# Altium PCB XOR1.PcbDoc
Units mm, origin at the board's own origin, x right, y up, seen from the top; angles counter-clockwise.
Board outline 27 x 17 mm, 2 copper layers (Top Layer, Bottom Layer); 24 components, 14 nets, 62 pads, 8 vias.
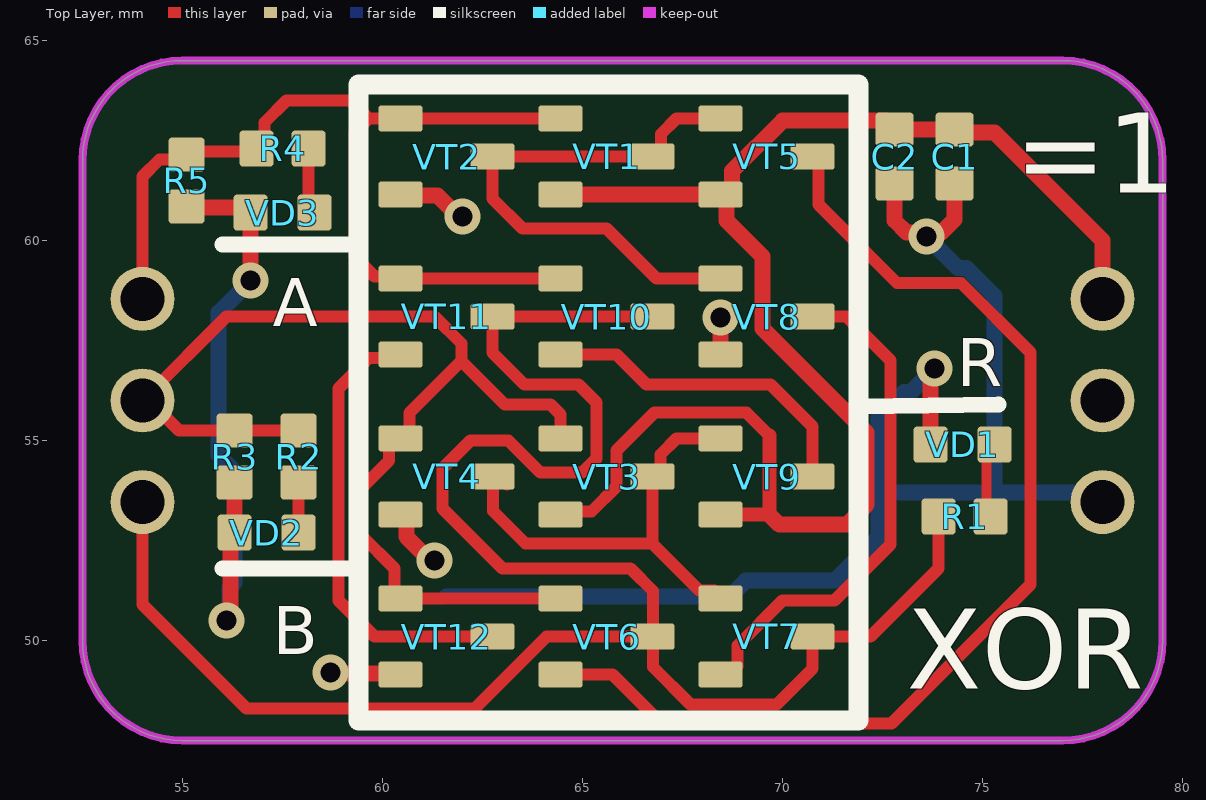
[diagram p0: Top Layer view]
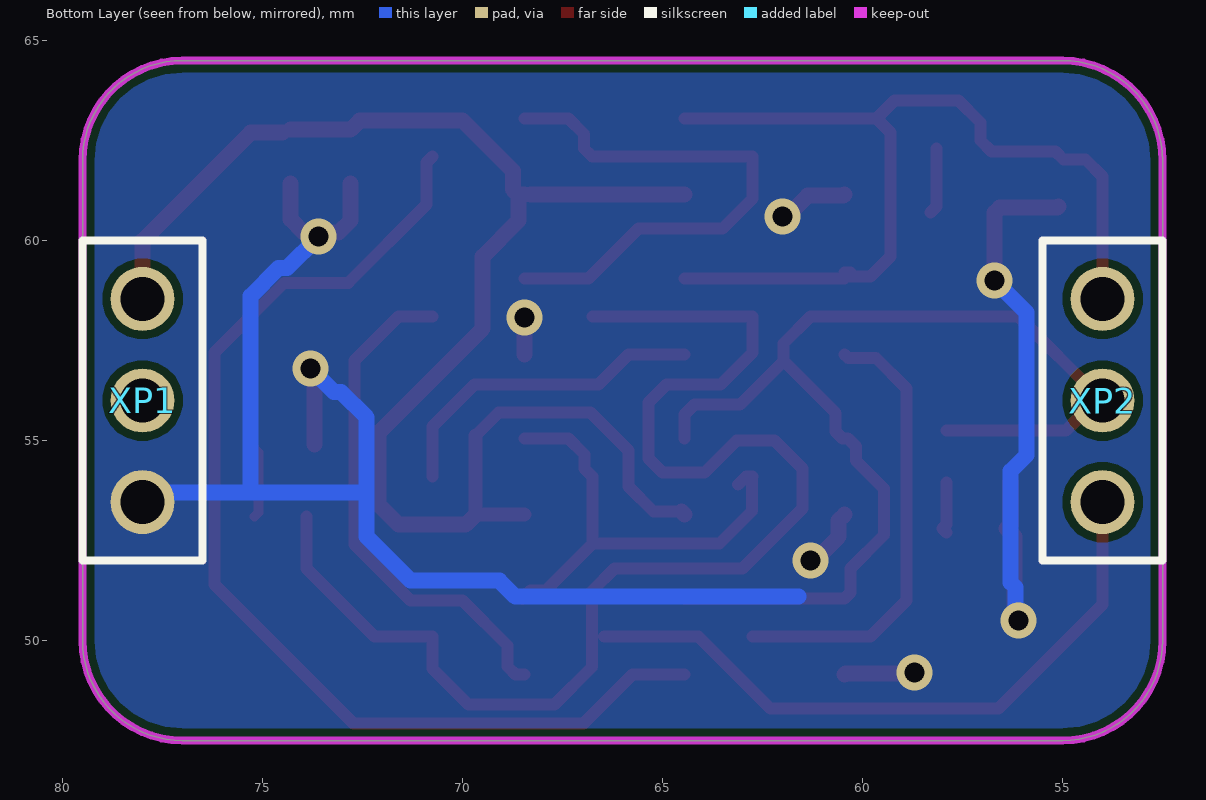
[diagram p1: Bottom Layer view, seen from below]
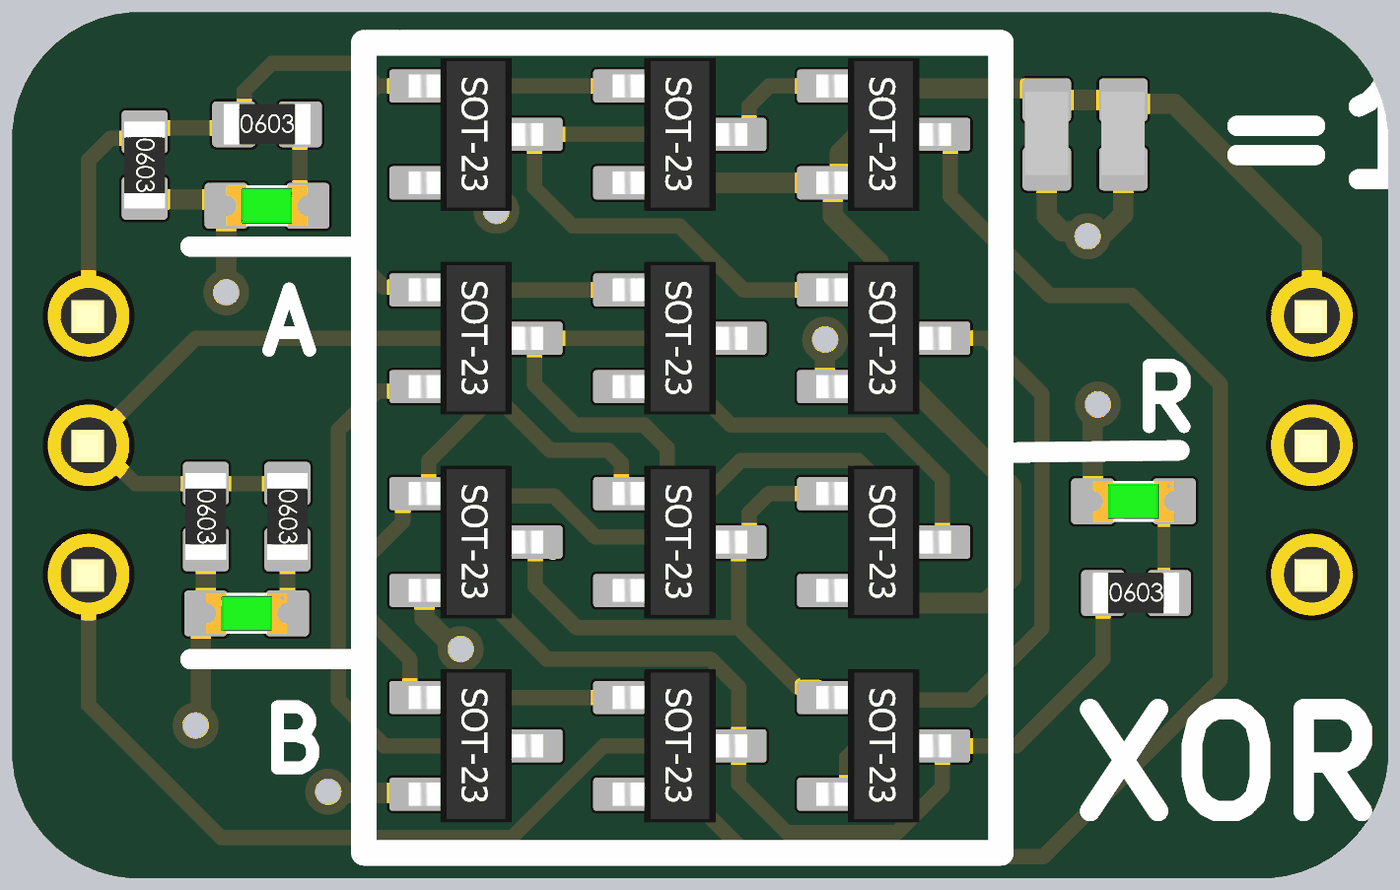
[diagram p2: 3D render of the assembled board from above, using the file's embedded part models]

## Layer stack, top to bottom
Top Solder: solder mask 0.0102, Solder Resist, Dk 3.5
Top Layer: signal copper 0.0356
Dielectric 1: dielectric 0.32, FR-4, Dk 4.8
Bottom Layer: signal copper 0.0356
Bottom Solder: solder mask 0.0102, Solder Resist, Dk 3.5

## Board outline
52.5,50 52.5,62 cw(c55,62) 55,64.5 77,64.5 cw(c77,62) 79.5,62 79.5,50 cw(c77,50) 77,47.5 55,47.5 cw(c55,50)

## Design rules (kind name [scope] priority, off if disabled: settings)
Clearance [All] p1: gap=0.2 ignorepadtopadclearanceinfootprint=FALSE
PolygonConnect [All] p1: connectstyle=Relief reliefconductorwidth=0.254 reliefentries=4 polygonreliefangle="90 Angle" airgapwidth=0.254
RoutingVias [All] p1: holewidth=0.6 width=1.2 viastyle="Through Hole" minholewidth=0.5 minwidth=0.9 maxholewidth=0.711 maxwidth=1.27
SolderMaskExpansion [All] p1: expansion=0.102 istentingtop=FALSE
Width [All] p1: maxlimit=5.254 minlimit=0.2 preferedwidth=0.25
30 further rules are at their usual default settings.

## Components (designator, comment, footprint, x,y, rotation, side; value= is the part's Value field where it differs from the comment)
C1 "0,1 мкФ ±* * * *, *" K10-79_1.6_0.8(0603) 74.3,62.1 r90 top value="0,1 мк"
C2 "0,01 мкФ ±* * * *, *" K10-79_1.6_0.8(0603) 72.8,62.1 r90 top value="0,01 мк"
R1 "1 кОм ±5 % 0603, RC0603JR-071KL" P1-12-0.1(0603) 74.55,53.1 r0 top value="1 к"
R2 "1 кОм ±5 % 0603, RC0603JR-071KL" P1-12-0.1(0603) 57.9,54.6 r270 top value="1 к"
R3 "1 МОм ±5 % 0603, RC0603JR-071KL" P1-12-0.1(0603) 56.3,54.6 r270 top value="1 М"
R4 "1 кОм ±5 % 0603, RC0603JR-071KL" P1-12-0.1(0603) 57.5,62.3 r0 top value="1 к"
R5 "1 МОм ±5 % 0603, RC0603JR-071KL" P1-12-0.1(0603) 55.1,61.5 r270 top value="1 М"
VD1 "VD - Светодиод" "LED 0603" 74.5,54.9 r180 top value=GNL-0805UBC-TL
VD2 "VD - Светодиод" "LED 0603" 57.1,52.7 r180 top value=GNL-0805UBC-TL
VD3 "VD - Светодиод" "LED 0603" 57.5,60.7 r180 top value=GNL-0805UBC-TL
VT1 "VT - Полевой транзистор P канал (MOSFET_P)" SOT23(KT-46) 65.6,62.1 r270 top
VT2 "VT - Полевой транзистор N канал (MOSFET_N)" SOT23(KT-46) 61.6,62.1 r270 top
VT3 "VT - Полевой транзистор P канал (MOSFET_P)" SOT23(KT-46) 65.6,54.1 r270 top
VT4 "VT - Полевой транзистор N канал (MOSFET_N)" SOT23(KT-46) 61.6,54.1 r270 top
VT5 "VT - Полевой транзистор P канал (MOSFET_P)" SOT23(KT-46) 69.6,62.1 r270 top
VT6 "VT - Полевой транзистор P канал (MOSFET_P)" SOT23(KT-46) 65.6,50.1 r270 top
VT7 "VT - Полевой транзистор N канал (MOSFET_N)" SOT23(KT-46) 69.6,50.1 r270 top
VT8 "VT - Полевой транзистор N канал (MOSFET_N)" SOT23(KT-46) 69.6,58.1 r270 top
VT9 "VT - Полевой транзистор P канал (MOSFET_P)" SOT23(KT-46) 69.6,54.1 r270 top
VT10 "VT - Полевой транзистор P канал (MOSFET_P)" SOT23(KT-46) 65.6,58.1 r270 top
VT11 "VT - Полевой транзистор N канал (MOSFET_N)" SOT23(KT-46) 61.6,58.1 r270 top
VT12 "VT - Полевой транзистор N канал (MOSFET_N)" SOT23(KT-46) 61.6,50.1 r270 top
XP1 "Вилка PLL1.27-1x3 RUICHI" "PCBComponent_1 - duplicate" 78,56 r0 bottom value=PLL1.27-1x3
XP2 "KONT_POLE_POWER" "PCBComponent_1 - duplicate" 54,56 r0 bottom value=PLL1.27-1x3

## Footprints (in the part's own frame and the unit in brackets; to place one, negate y for a bottom-side part, rotate by r counter-clockwise, add the part's x,y. Pads: shape width x height; smd on the part's side, far side on the other; paste and mask are expansions set on the pad)
K10-79_1.6_0.8(0603) [mm]
  rrect20% 0.85x0.95 smd mask+0.05: 1(-0.675,0) 2(0.675,0)
  body extent -0.8,-0.42 0.84,0.43, height 0.41
"LED 0603" [mm]
  rrect20% 0.85x0.9 smd mask+0.05: 1(-0.8,0) 2(0.8,0)
  body extent -0.8,-0.4 0.8,0.4, height 0.6
P1-12-0.1(0603) [mm]
  rrect20% 0.85x0.9 smd mask+0.05: 1(-0.65,0) 2(0.65,0)
  Top Layer pour cut-out: -0.225,0.4 0.225,0.4 0.225,-0.4 -0.225,-0.4
  body extent -0.85,-0.4 0.85,0.4, height 0.56
"PCBComponent_1 - duplicate" [mm]
  round 1.6 hole 1.1: 1(0,-2.54) 2(0,0) 3(0,2.54)
  silkscreen extent -1.5,-4 1.5,4, body extent -1.29,-3.8 1.25,3.82, height 8.54
SOT23(KT-46) [mm]
  rrect20% 0.65x1.1 smd mask+0.05: 1(-0.95,-1.15) 2(0.95,-1.15) 3(0,1.15)
  body extent -1.5,-1.32 1.5,1.32, height 1.08

## Part data
C1 C2: library part "C - Конденсатор"
R1 R2 R3 R4 R5: library part "R - Резистор", Package=0603, PartNumber=RC0603JR-071KL, Tolerance="5 %", Company=Yageo
VD1 VD2 VD3: Package=0603, PartNumber=GNL-0805UBC-TL, Company=G-nor
VT1 VT2 VT3 VT4 VT5 VT6 VT7 VT8 VT9 VT10 VT11 VT12: "VT"
XP1 XP2: library part "X - Контактное поле х3", PartNumber=PLL1.27-1x3, Company=RUICHI
  XP1: 1=Питание, 2=-, 3=Общий
  XP2: 1="Вход 1", 2="Вход 2", 3=Выход

## Via types
v1: diameter 0.9, hole 0.5, Top Layer to Bottom Layer, tented both sides, 8 vias

## Nets (pads, with @x,y where several pads share a name; then routed paths per layer and width w, separated by ;. In a path a pad name is that pad's centre, name@x,y a point inside that pad or via, vN(x,y) a via of type N, cw(c..) or ccw(c..) an arc to the next point about the centre after c; other vN are vias at no path point)
A_IN: R4.1 R5.1 VT1.1 VT2.1 VT10.1 VT11.1 XP2.1 | length 23.8
  Top Layer w0.3: XP2.1 54,61.6 54.421,62.021 54.971,62.021 55.175,62.225 56.775,62.225 57.053,62.503 57.053,62.953 57.6,63.5 59.2,63.5 59.65,63.05 ; VT11.1@60.3,59.1 59.8,59.1 59.3,59.6 59.3,62.7 59.65,63.05 ; VT11.1@60.3,59.2 60.45,59.2 VT11.1 VT10.1 ; VT1.1 VT2.1 59.65,63.05
B_IN: R2.1 R3.1 VT3.1 VT4.1 VT6.1 VT12.1 XP2.2 | length 28.6
  Top Layer w0.3: XP2.2@54.081,56.081 56.1,58.1 61.3,58.1 61.97,57.43 61.97,56.986 ; XP2.2@54.162,56 54.912,55.25 R3.1 R2.1 ; VT6.1 VT12.1 60.3,51.2 60.3,51.8 59.467,52.633 59.467,53.8 60.163,54.496 60.163,54.85 60.363,55.05 60.5,55.05 60.675,55.225 60.675,55.691 61.97,56.986 ; VT3.1@64.451,55.051 64.451,55.649 64.2,55.9 63.057,55.9 61.97,56.986
GND: C1.1 C2.1 R3.2 R5.2 VD1.2 VD2.2 VD3.2 VT2.2 VT4.2 VT8.2 VT12.2 XP1.3 | length 56.7
  Top Layer w0.4: R5.2 55.125,60.825 VD3.2@56.575,60.825 ; v1(56.1,50.5) 56.2,50.6 56.2,52.6 56.4,52.8 56.3,52.9 R3.2 ; v1(56.7,59) VD3.2 ; v1(58.7,49.2) 58.725,49.175 60.425,49.175 VT12.2 ; VT4.2 60.595,53.005 60.595,52.596 v1@60.996,52.196 ; VT2.2 60.475,61.125 61.375,61.125 61.9,60.6 v1(62,60.6) ; VT8.2 v1(68.45,58.075) ; C2.1 72.8,60.5 73.104,60.196 73.504,60.196 v1(73.6,60.1) 73.696,60.196 73.969,60.196 74.3,60.527 C1.1 ; VD1.2 73.7,56.7 v1(73.8,56.8) ; VD3.2@56.575,60.825 VD3.2 ; VD3.2@56.575,60.825 VD3.2
  Bottom Layer w0.4: v1(56.1,50.5) 56.175,50.575 56.175,51.325 56.3,51.45 56.3,54.238 55.9,54.638 55.9,58.2 v1(56.7,59) ; 61.6,51.1 68.679,51.1 69.079,51.5 71.3,51.5 72.4,52.6 72.4,53.7 ; v1(73.6,60.1) 74.392,59.308 74.604,59.308 75.3,58.612 75.3,53.7 ; v1(73.8,56.8) 73.216,56.217 73.039,56.217 72.4,55.578 72.4,53.7 ; XP1.3 77.76,53.7 75.3,53.7 ; 72.4,53.7 75.3,53.7
  other v1: 61.3,52
NetR1_2: R1.2 VD1.1 | length 1.9
  Top Layer w0.25: R1.2 75.1,53.2 75.1,54.7 VD1.1
NetR2_2: R2.2 VD2.1 | length 1.3
  Top Layer w0.3: VD2.1 58,52.8 57.9,52.9 R2.2
NetR4_2: R4.2 VD3.1 | length 1.7
  Top Layer w0.3: R4.2 58.15,60.85 VD3.1
NetVT1_2: VT1.3 VT2.3 VT5.1 VT8.1 | length 13.9
  Top Layer w0.3: VT1.3 VT2.3 62.75,61.049 63.499,60.3 65.6,60.3 66.85,59.05 VT8.1 ; VT1.3@66.759,62.1 66.957,62.298 66.957,62.657 67.35,63.05 VT5.1
NetVT3_2: VT3.3 VT4.3 VT7.1 VT9.1 | length 11.9
  Top Layer w0.3: VT4.3@63.11,53.9 62.91,54.1 VT4.3 62.757,54.093 62.757,53.243 63.58,52.42 66.75,52.42 ; VT9.1 67.35,55.05 66.954,54.654 66.954,54.3 66.754,54.1 VT3.3 66.75,52.42 ; VT7.1@68.504,51.05 68.304,51.25 67.92,51.25 66.75,52.42
NetVT5_2: VT5.3 VT6.2 | length 27.6
  Top Layer w0.3: VT6.2 65.75,49.15 66.975,47.925 72.725,47.925 76.2,51.4 76.2,57.2 74.456,58.944 72.856,58.944 70.9,60.9 70.9,61.95 VT5.3
NetVT7_2: VT7.2 VT8.3 | length 12.9
  Top Layer w0.3: VT7.2 68.675,49.15 68.873,49.348 68.873,49.873 70,51 71.3,51 72.7,52.4 72.7,57 71.6,58.1 VT8.3
NetVT9_2: VT9.3 VT10.2 | length 8.3
  Top Layer w0.3: VT10.2 65.85,57.15 66.6,56.4 69.7,56.4 70.75,55.35 VT9.3
NetVT11_2: VT11.2 VT12.3 | length 11.4
  Top Layer w0.3: VT11.2 60.368,57.068 59.668,57.068 58.9,56.3 58.9,51 59.8,50.1 VT12.3
R_OUT: R1.1 VT6.3 VT7.3 VT10.3 VT11.3 XP2.3 | length 50.6
  Top Layer w0.3: XP2.3 54,50.9 56.6,48.3 62.303,48.3 64.103,50.1 VT6.3@66.465,50.1 ; VT10.3 VT11.3 62.75,57.196 63.546,56.4 64.9,56.4 65.35,55.95 65.35,54.55 65,54.2 63.947,54.2 63.147,55 62.2,55 61.5,54.3 61.5,53.3 63,51.8 66.2,51.8 66.757,51.243 66.757,50.1 66.757,49.343 67.7,48.4 69.854,48.4 70.75,49.296 VT7.3 72.2,50.1 73.9,51.8 R1.1
Vdd: C1.2 C2.2 VT1.2 VT3.2 VT5.2 VT9.2 XP1.1 | length 38.8
  Top Layer w0.3: VT3.2@64.529,53.229 65.229,53.229 65.85,53.85 65.85,54.75 66.8,55.7 69.097,55.7 69.673,55.124
  Top Layer w0.35: VT9.2 69.55,53.15 ; 69.673,53.15 69.673,55.124
  Top Layer w0.4: VT3.2 VT3.2@64.529,53.229 ; VT1.2 VT5.2@68.3,61.15 ; VT5.2 68.618,61.15 68.743,61.275 68.743,61.743 70,63 72.575,63 C2.2 C1.2 ; VT5.2@68.604,60.996 68.604,60.496 69.5,59.6 69.5,57.8 72.1,55.2 72.1,53.4 71.6,52.9 69.923,52.9 69.673,53.15 ; C1.2@74.5,62.7 75.3,62.7 78,60 XP1.1
pads on no net: XP1.2

## Polygon pours and split planes (outlines as drawn)
GND on Bottom Layer "GND_L02_P000" (solid, remove dead copper, pour order 0): 51.5,65.4 51.6,65.3 51.6,46.8 80.1,46.8 80.4,47.1 80.4,65.4

## Keep-outs
Keep-Out Layer:
  the board outline again, w0.2

## Silkscreen, mask and mechanical layers (free items; w line width, h text height)
Top Overlay:
  lines w0.4: 56,51.8 59.4,51.8 ; 56,59.9 59.4,59.9 ; 71.901,55.854 75.4,55.9
  lines w0.5: 59.4,48 59.4,63.9 60.063,63.9 71.9,63.9 71.9,48 59.4,48
  text "=1" at 75.8,61.2 h2
  text "A" at 57.254,57.854 h1.2
  text "R" at 74.354,56.354 h1.2
  text "B" at 57.254,49.654 h1.2
  text "XOR" at 73.1,48.8 h2
Mechanical 1:
  lines w0.2: 52.5,50 ccw(c55,50) 55,47.5 ; 52.5,50 ccw(c55,50) 55,47.5 ; 52.5,50 52.5,62 ; 52.5,50 52.5,62 ; 52.5,62 cw(c55,62) 55,64.5 ; 52.5,62 cw(c55,62) 55,64.5 ; 55,47.5 77,47.5 ; 55,47.5 77,47.5 ; 55,64.5 77,64.5 ; 55,64.5 77,64.5 ; 77,47.5 ccw(c77,50) 79.5,50 ; 77,47.5 ccw(c77,50) 79.5,50 ; 77,64.5 cw(c77,62) 79.5,62 ; 77,64.5 cw(c77,62) 79.5,62 ; 79.5,50 79.5,62 ; 79.5,50 79.5,62
Mechanical 5:
  lines w0.2: 42.499,57.718 77.959,57.718
Mechanical 9:
  lines w0.4: 54,56 78,56

## Dimensions
77,64.5 to 77,47.5 on Mechanical 9
54,58.54 to 78,58.54 on Mechanical 9
52.5,62 to 79.5,62 on Mechanical 9
52.959,57.718 to 76.959,57.718 on Mechanical 5
78.459,63.178 to 76.959,57.718 on Mechanical 5